# Altium PCB TK510_Signalbakplan.PcbDoc
Units mm, origin at the board's own origin, x right, y up, seen from the top; angles counter-clockwise.
Board outline 300 x 100 mm, 4 copper layers (Component Side, Ground Plane, Power Plane, Solder Side), stack 0.844 mm thick; 144 components, 132 nets, 717 pads, 0 vias.
Unrouted connection lines stored in the file: 233.
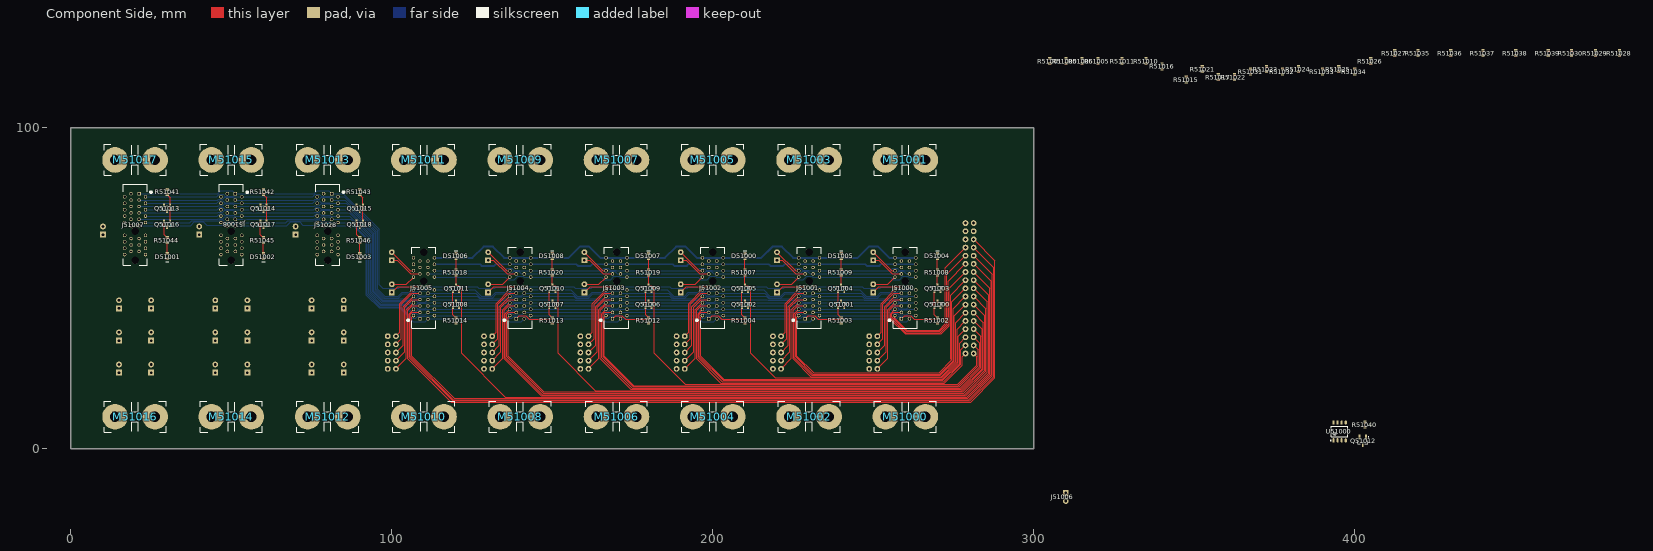
[diagram p0: Component Side view]
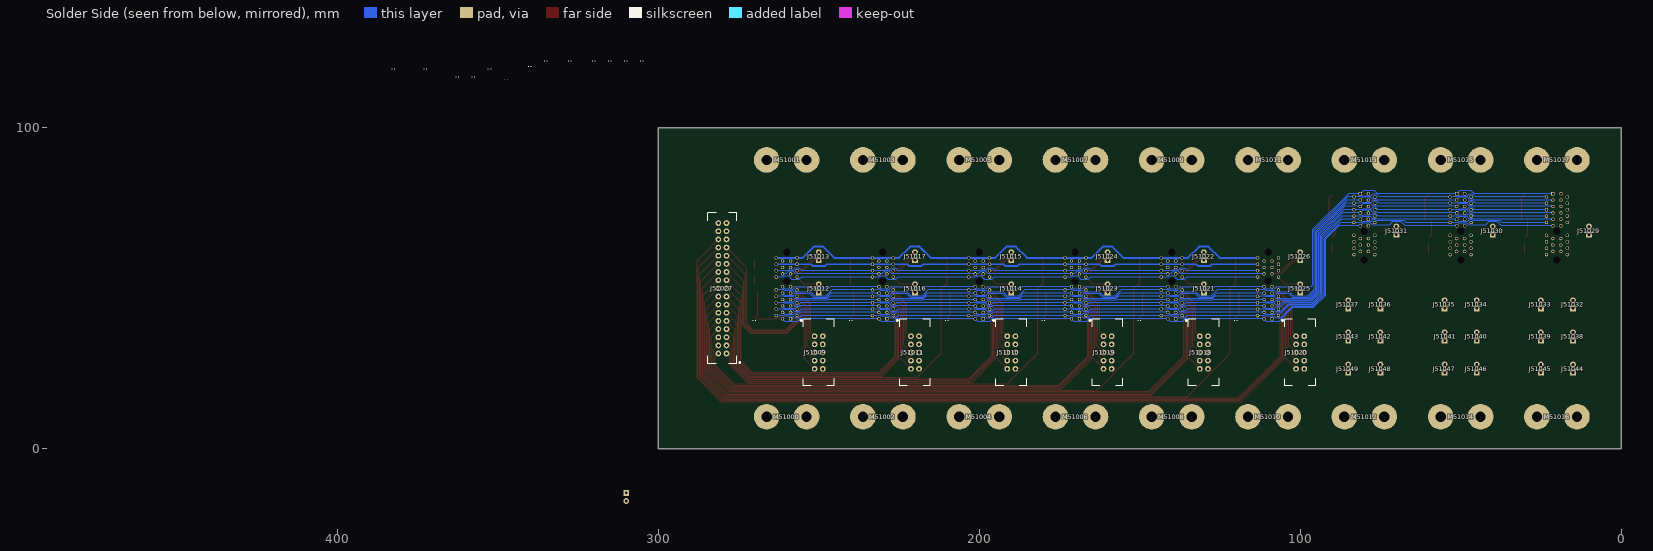
[diagram p1: Solder Side view, seen from below]
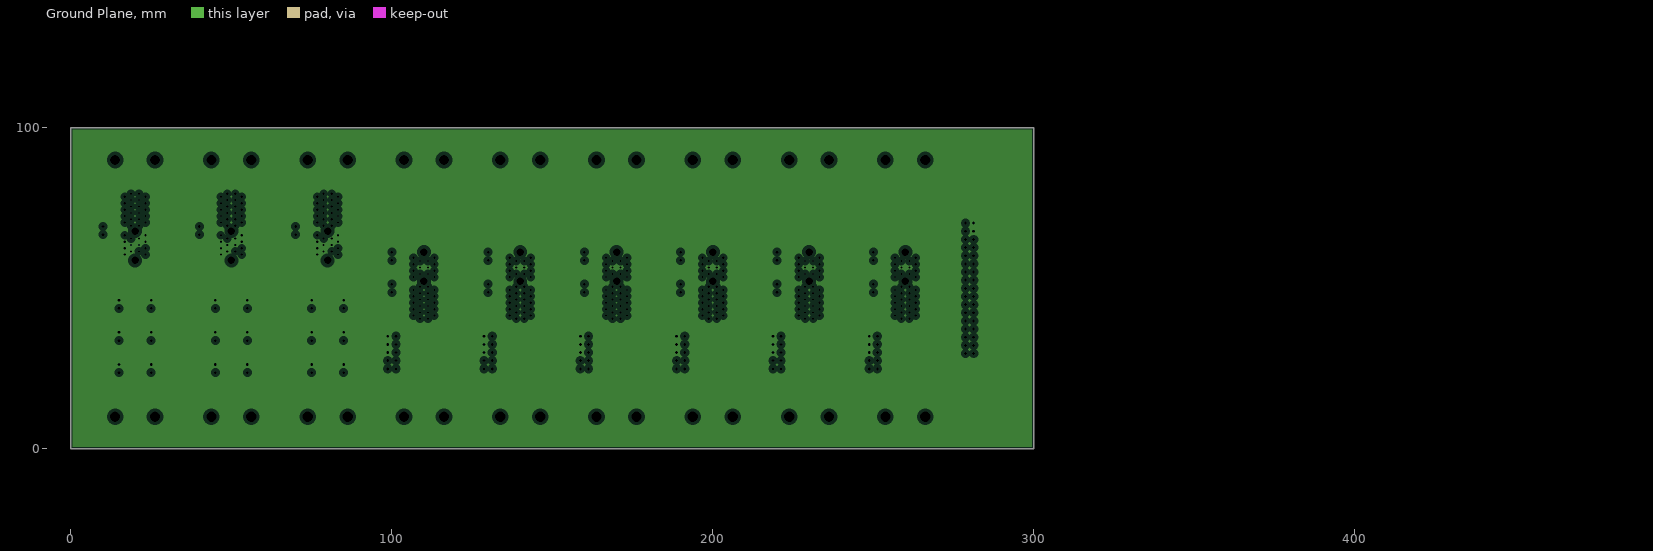
[diagram p2: Ground Plane, clearances drawn from the general rule]
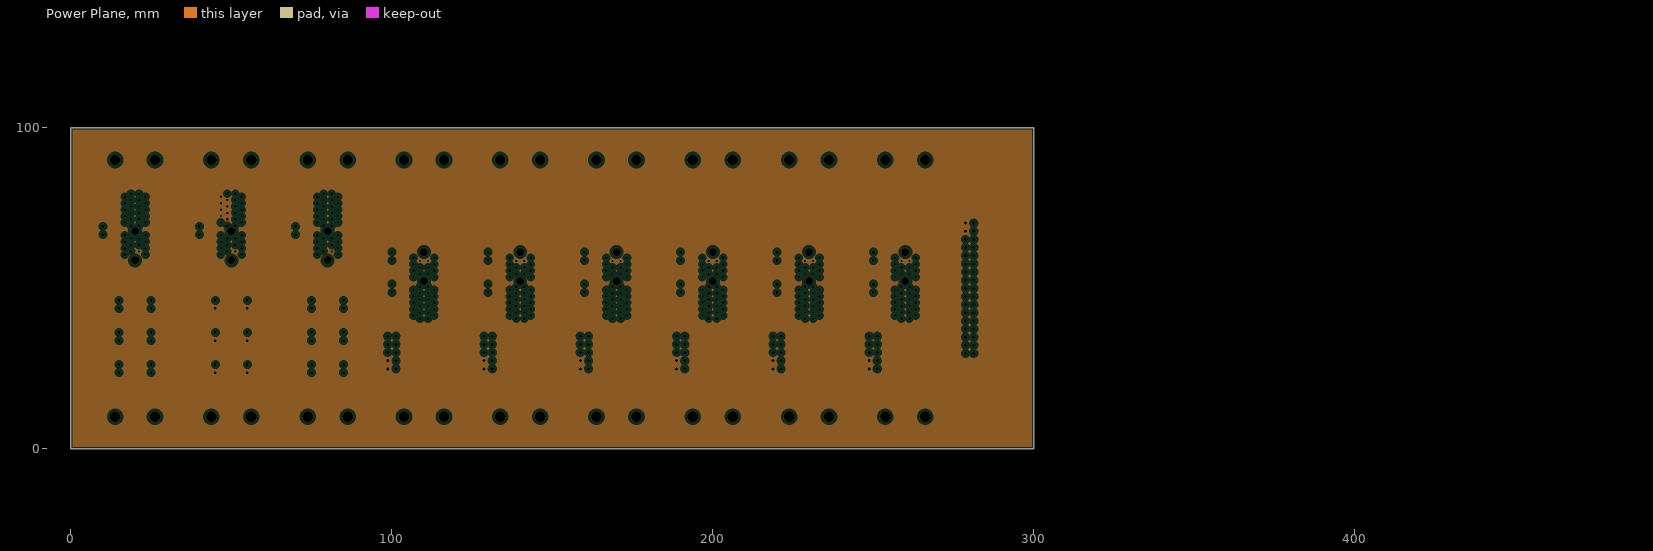
[diagram p3: Power Plane, clearances drawn from the general rule]

## Layer stack, top to bottom
Top Solder: solder mask 0.0102, Solder Resist, Dk 3.5
Component Side: signal copper 0.0356
Dielectric 1: core 0.32, FR-4, Dk 4.8
Ground Plane: plane copper 0.036, net GND
Dielectric 3: prepreg 0.127, Dk 4.2
Power Plane: plane copper 0.036, net VCC_P5V0
Dielectric 4: core 0.254, Dk 4.2
Solder Side: signal copper 0.0356
Bottom Solder: solder mask 0.0102, Solder Resist, Dk 3.5

## Board outline
0,0 0,100 300,100 300,0 0,0

## Design rules (kind name [scope] priority, off if disabled: settings)
Clearance [All] p1: gap=0.16 except(0: Arc-Text Track-Text SMDPad-Text THPad-Text Via-Text Fill-Text Poly-Text Region-Text Text-Text)
Height [All] p1: minheight=0 maxheight=200 prefheight=12.7
HoleSize [All] p1: absolutevalues=TRUE maxlimit=6.35 minlimit=0.3 maxpercent=80.000 minpercent=20.000
MinimumSolderMaskSliver [All] p1: minsoldermaskwidth=0.1
PlaneClearance [All] p1: clearance=1
PlaneConnect [All] p1: planeconnectstyle=Relief reliefexpansion=0.508 reliefentries=4 reliefconductorwidth=1 reliefairgap=0.254
PolygonConnect PolygonConnect_1 [IsVia] p1: connectstyle=Direct reliefconductorwidth=0.254 reliefentries=4 polygonreliefangle="90 Angle" airgapwidth=0.254
PolygonConnect [All] p2: connectstyle=Relief reliefconductorwidth=0.2 reliefentries=4 polygonreliefangle="90 Angle" airgapwidth=0.2
RoutingVias [All] p1: holewidth=0.3 width=0.6 viastyle="Through Hole" minholewidth=0.3 minwidth=0.6 maxholewidth=6.35 maxwidth=10
SilkToSolderMaskClearance [IsPad] p1: minsilkscreentomaskgap=0.178 clearancetoexposedcopper=TRUE
SolderMaskExpansion [All] p1: expansion=0.102
Width [All] p1: maxlimit=10 minlimit=0.16 preferedwidth=0.4
24 further rules are at their usual default settings.

## Classes and differential pairs
component class TK510: M51000 M51001 M51002 M51003 M51004 M51005 M51006 M51007 M51008 M51009 M51010 M51011 M51012 M51013 M51014 M51015 M51016 M51017

## Components (designator, comment, footprint, x,y, rotation, side; value= is the part's Value field where it differs from the comment)
D51000 "SMD LED Red" I_LEDC0603(1608)_N 210,60 r90 top locked
D51001 "SMD LED Red" I_LEDC0603(1608)_N 30,60 r270 top locked
D51002 "SMD LED Red" I_LEDC0603(1608)_N 60,60 r270 top locked
D51003 "SMD LED Red" I_LEDC0603(1608)_N 90,60 r270 top locked
D51004 "SMD LED Red" I_LEDC0603(1608)_N 270,60 r90 top locked
D51005 "SMD LED Red" I_LEDC0603(1608)_N 240,60 r90 top locked
D51006 "SMD LED Red" I_LEDC0603(1608)_N 120,60 r90 top locked
D51007 "SMD LED Red" I_LEDC0603(1608)_N 180,60 r90 top locked
D51008 "SMD LED Red" I_LEDC0603(1608)_N 150,60 r90 top locked
J51000 "PCI_Express-36P" PCI_Express-36P 260,50 r90 top locked
J51001 "PCI_Express-36P" PCI_Express-36P 230,50 r90 top locked
J51002 "PCI_Express-36P" PCI_Express-36P 200,50 r90 top locked
J51003 "PCI_Express-36P" PCI_Express-36P 170,50 r90 top locked
J51004 "PCI_Express-36P" PCI_Express-36P 140,50 r90 top locked
J51005 "PCI_Express-36P" PCI_Express-36P 110,50 r90 top locked
J51006 "JST 2pin" JST_2P 310,-15 r180 top locked
J51007 "PCI_Express-36P" PCI_Express-36P 20,70 r270 top locked
J51008 "PCI_Express-36P" PCI_Express-36P 50,70 r270 top locked
J51009 "2X5PConnector" HDRV10W64P254_2X5_2030X900X900B 250,30 r180 bottom locked
J51010 "2X5PConnector" HDRV10W64P254_2X5_2030X900X900B 190,30 r180 bottom locked
J51011 "2X5PConnector" HDRV10W64P254_2X5_2030X900X900B 220,30 r180 bottom locked
J51012 "JST 2pin" JST_2P 250,50 r180 bottom locked
J51013 "JST 2pin" JST_2P 250,60 r180 bottom locked
J51014 "JST 2pin" JST_2P 190,50 r180 bottom locked
J51015 "JST 2pin" JST_2P 190,60 r180 bottom locked
J51016 "JST 2pin" JST_2P 220,50 r180 bottom locked
J51017 "JST 2pin" JST_2P 220,60 r180 bottom locked
J51018 "2X5PConnector" HDRV10W64P254_2X5_2030X900X900B 130,30 r180 bottom locked
J51019 "2X5PConnector" HDRV10W64P254_2X5_2030X900X900B 160,30 r180 bottom locked
J51020 "2X5PConnector" HDRV10W64P254_2X5_2030X900X900B 100,30 r180 bottom locked
J51021 "JST 2pin" JST_2P 130,50 r180 bottom locked
J51022 "JST 2pin" JST_2P 130,60 r180 bottom locked
J51023 "JST 2pin" JST_2P 160,50 r180 bottom locked
J51024 "JST 2pin" JST_2P 160,60 r180 bottom locked
J51025 "JST 2pin" JST_2P 100,50 r180 bottom locked
J51026 "JST 2pin" JST_2P 100,60 r180 bottom locked
J51027 "2X17PConnector" HDRV34W64P254_2X17_5070X900X900B 280,50 r0 bottom locked
J51028 "PCI_Express-36P" PCI_Express-36P 80,70 r270 top locked
J51029 "JST 2pin" JST_2P 10,68 r180 bottom locked
J51030 "JST 2pin" JST_2P 40,68 r180 bottom locked
J51031 "JST 2pin" JST_2P 70,68 r180 bottom locked
J51032 "JST 2pin" JST_2P 15,45 r180 bottom locked
J51033 "JST 2pin" JST_2P 25,45 r180 bottom locked
J51034 "JST 2pin" JST_2P 45,45 r180 bottom locked
J51035 "JST 2pin" JST_2P 55,45 r180 bottom locked
J51036 "JST 2pin" JST_2P 75,45 r180 bottom locked
J51037 "JST 2pin" JST_2P 85,45 r180 bottom locked
J51038 "JST 2pin" JST_2P 15,35 r180 bottom locked
J51039 "JST 2pin" JST_2P 25,35 r180 bottom locked
J51040 "JST 2pin" JST_2P 45,35 r180 bottom locked
J51041 "JST 2pin" JST_2P 55,35 r180 bottom locked
J51042 "JST 2pin" JST_2P 75,35 r180 bottom locked
J51043 "JST 2pin" JST_2P 85,35 r180 bottom locked
J51044 "JST 2pin" JST_2P 15,25 r180 bottom locked
J51045 "JST 2pin" JST_2P 25,25 r180 bottom locked
J51046 "JST 2pin" JST_2P 45,25 r180 bottom locked
J51047 "JST 2pin" JST_2P 55,25 r180 bottom locked
J51048 "JST 2pin" JST_2P 75,25 r180 bottom locked
J51049 "JST 2pin" JST_2P 85,25 r180 bottom locked
M51000 "CardHolder" CardHolder900X1900X84000 260,10 r270 top locked
M51001 "CardHolder" CardHolder900X1900X84000 260,90 r270 top locked
M51002 "CardHolder" CardHolder900X1900X84000 230,10 r270 top locked
M51003 "CardHolder" CardHolder900X1900X84000 230,90 r270 top locked
M51004 "CardHolder" CardHolder900X1900X84000 200,10 r270 top locked
M51005 "CardHolder" CardHolder900X1900X84000 200,90 r270 top locked
M51006 "CardHolder" CardHolder900X1900X84000 170,10 r270 top locked
M51007 "CardHolder" CardHolder900X1900X84000 170,90 r270 top locked
M51008 "CardHolder" CardHolder900X1900X84000 140,10 r270 top locked
M51009 "CardHolder" CardHolder900X1900X84000 140,90 r270 top locked
M51010 "CardHolder" CardHolder900X1900X84000 110,10 r270 top locked
M51011 "CardHolder" CardHolder900X1900X84000 110,90 r270 top locked
M51012 "CardHolder" CardHolder900X1900X84000 80,10 r270 top locked
M51013 "CardHolder" CardHolder900X1900X84000 80,90 r270 top locked
M51014 "CardHolder" CardHolder900X1900X84000 50,10 r270 top locked
M51015 "CardHolder" CardHolder900X1900X84000 50,90 r270 top locked
M51016 "CardHolder" CardHolder900X1900X84000 20,10 r270 top locked
M51017 "CardHolder" CardHolder900X1900X84000 20,90 r270 top locked
Q51000 "2N7002" SOT23-3_N 270,45 r180 top locked
Q51001 "2N7002" SOT23-3_N 240,45 r180 top locked
Q51002 "2N7002" SOT23-3_N 210,45 r180 top locked
Q51003 "BSH201" SOT23-3_N 270,50 r180 top locked
Q51004 "BSH201" SOT23-3_N 240,50 r180 top locked
Q51005 "BSH201" SOT23-3_N 210,50 r180 top locked
Q51006 "2N7002" SOT23-3_N 180,45 r180 top locked
Q51007 "2N7002" SOT23-3_N 150,45 r180 top locked
Q51008 "2N7002" SOT23-3_N 120,45 r180 top locked
Q51009 "BSH201" SOT23-3_N 180,50 r180 top locked
Q51010 "BSH201" SOT23-3_N 150,50 r180 top locked
Q51011 "BSH201" SOT23-3_N 120,50 r180 top locked
Q51012 "TSM2314" SOT95P280X130-3N 402.5,2.5 r270 top
Q51013 "2N7002" SOT23-3_N 30,75 r0 top locked
Q51014 "2N7002" SOT23-3_N 60,75 r0 top locked
Q51015 "2N7002" SOT23-3_N 90,75 r0 top locked
Q51016 "BSH201" SOT23-3_N 30,70 r0 top locked
Q51017 "BSH201" SOT23-3_N 60,70 r0 top locked
Q51018 "BSH201" SOT23-3_N 90,70 r0 top locked
R51000 "100k" RESC0603(1608)_N#1 310,120.8 r270 top
R51001 "100k" RESC0603(1608)_N#1 305,120.8 r270 top
R51002 "100k" RESC0603(1608)_N#1 270,40 r270 top locked
R51003 "100k" RESC0603(1608)_N#1 240,40 r270 top locked
R51004 "100k" RESC0603(1608)_N#1 210,40 r270 top locked
R51005 "100k" RESC0603(1608)_N#1 320,120.8 r270 top
R51006 "100k" RESC0603(1608)_N#1 315,120.8 r270 top
R51007 "47R" RESC0603(1608)_N#1 210,55 r270 top locked
R51008 "47R" RESC0603(1608)_N#1 270,55 r270 top locked
R51009 "47R" RESC0603(1608)_N#1 240,55 r270 top locked
R51010 "100k" RESC0603(1608)_N#1 335,120.8 r270 top
R51011 "100k" RESC0603(1608)_N#1 327.5,120.8 r270 top
R51012 "100k" RESC0603(1608)_N#1 180,40 r270 top locked
R51013 "100k" RESC0603(1608)_N#1 150,40 r270 top locked
R51014 "100k" RESC0603(1608)_N#1 120,40 r270 top locked
R51015 "100k" RESC0603(1608)_N#1 347.5,115 r270 top
R51016 "100k" RESC0603(1608)_N#1 340,119.1 r270 top
R51017 "100k" RESC0603(1608)_N#1 357.5,115.8 r270 top
R51018 "47R" RESC0603(1608)_N#1 120,55 r270 top locked
R51019 "47R" RESC0603(1608)_N#1 180,55 r270 top locked
R51020 "47R" RESC0603(1608)_N#2 150,55 r90 top locked
R51021 "100k" RESC0603(1608)_N#1 352.5,118.3 r270 top
R51022 "100k" RESC0603(1608)_N#1 362.5,115.8 r270 top
R51023 "100k" RESC0603(1608)_N#1 372.5,118.3 r270 top
R51024 "100k" RESC0603(1608)_N#1 382.5,118.3 r270 top
R51025 "100k" RESC0603(1608)_N#1 395,118.3 r270 top
R51026 "100k" RESC0603(1608)_N#1 405,120.8 r270 top
R51027 "100k" RESC0603(1608)_N#1 412.5,123.3 r270 top
R51028 "100k" RESC0603(1608)_N#1 482.5,123.3 r270 top
R51029 "100k" RESC0603(1608)_N#2 475,123.3 r270 top
R51030 "100k" RESC0603(1608)_N#2 467.5,123.3 r270 top
R51031 "100k" RESC0603(1608)_N#1 367.5,117.5 r90 top
R51032 "100k" RESC0603(1608)_N#1 377.5,117.5 r90 top
R51033 "100k" RESC0603(1608)_N#1 390,117.5 r90 top
R51034 "100k" RESC0603(1608)_N#1 400,117.5 r90 top
R51035 "100k" RESC0603(1608)_N#1 419.699,123.299 r90 top
R51036 "100k" RESC0603(1608)_N#1 429.899,123.299 r90 top
R51037 "100k" RESC0603(1608)_N#1 439.999,123.299 r90 top
R51038 "100k" RESC0603(1608)_N#1 450.198,123.299 r90 top
R51039 "100k" RESC0603(1608)_N#1 460.298,123.299 r90 top
R51040 "100k" RESC0603(1608)_N#1 403.198,7.499 r90 top
R51041 "100k" RESC0603(1608)_N#1 30,80 r90 top locked
R51042 "100k" RESC0603(1608)_N#1 60,80 r90 top locked
R51043 "100k" RESC0603(1608)_N#1 90,80 r90 top locked
R51044 "47R" RESC0603(1608)_N#1 30,65 r90 top locked
R51045 "47R" RESC0603(1608)_N#1 60,65 r90 top locked
R51046 "47R" RESC0603(1608)_N#1 90,65 r90 top locked
U51000 "Dual_Optocoupler" SOIC127P590X363-8N 395.298,5.399 r90 top

## Footprints (in the part's own frame and the unit in brackets; to place one, negate y for a bottom-side part, rotate by r counter-clockwise, add the part's x,y. Pads: shape width x height; smd on the part's side, far side on the other; paste and mask are expansions set on the pad)
CardHolder900X1900X84000 [mm]
  round 8 hole 3.2: 0(0,6.223) 0(0,-6.223)
  silkscreen extent -4.83,-9.65 4.83,9.65, body extent -4.57,-9.4 4.57,9.4, height 83.82
HDRV10W64P254_2X5_2030X900X900B [mm]
  round 1.8 hole 0.9: 1(-1.27,5.08) 2(1.27,5.08) 3(-1.27,2.54) 4(1.27,2.54) 5(-1.27,0) 6(1.27,0) 7(-1.27,-2.54) 8(1.27,-2.54) 9(-1.27,-5.08) 10(1.27,-5.08)
  silkscreen extent -5.7,-10.4 4.8,10.4, body extent -4.57,-10.16 4.57,10.16, height 9.86
HDRV34W64P254_2X17_5070X900X900B [mm]
  round 1.8 hole 0.9: 1(-1.27,20.32) 2(1.27,20.32) 3(-1.27,17.78) 4(1.27,17.78) 5(-1.27,15.24) 6(1.27,15.24) 7(-1.27,12.7) 8(1.27,12.7) 9(-1.27,10.16) 10(1.27,10.16) 11(-1.27,7.62) 12(1.27,7.62) 13(-1.27,5.08) 14(1.27,5.08) 15(-1.27,2.54) 16(1.27,2.54) 17(-1.27,0) 18(1.27,0) 19(-1.27,-2.54) 20(1.27,-2.54) 21(-1.27,-5.08) 22(1.27,-5.08) 23(-1.27,-7.62) 24(1.27,-7.62) 25(-1.27,-10.16) 26(1.27,-10.16) 27(-1.27,-12.7) 28(1.27,-12.7) 29(-1.27,-15.24) 30(1.27,-15.24) 31(-1.27,-17.78) 32(1.27,-17.78) 33(-1.27,-20.32) 34(1.27,-20.32)
  silkscreen extent -5.6,-23.5 4.5,23.5, body extent -4.87,-22.95 4.88,22.95, height 10.45
I_LEDC0603(1608)_N [mm] "Chip Resistor, Body 1.6x0.8mm, IPC Medium Density"
  rect 0.9x1 smd: 1(-0.8,0) 2(0.8,0)
  silkscreen extent -0.05,-0.51 1.65,0.51, body extent -0.85,-0.45 0.85,0.45, height 0.9
JST_2P [mm]
  rect 1.8x1.8 hole 0.8: 1(0,-1.27)
  round 1.8 hole 0.8: 2(0,1.27)
  body extent -2.4,-3.7 3.35,3.7, height 7
PCI_Express-36P [mm] "Board-to-Board Connector, PTH, Vertical, Pitch 1.00mm, 36-Position"
  rect 1.05x1.05 hole 0.7: A1(-9.5,1.245)
  round 1.05 hole 0.7: A2(-8.5,3.245) A3(-7.5,1.245) A4(-6.5,3.245) A5(-5.5,1.245) A6(-4.5,3.245) A7(-3.5,1.245) A8(-2.5,3.245) A9(-1.5,1.245) A10(-0.5,3.245) A11(0.5,1.245) A12(3.5,3.245) A13(4.5,1.245) A14(5.5,3.245) A15(6.5,1.245) A16(7.5,3.245) A17(8.5,1.245) A18(9.5,3.245) B1(-9.5,-1.255) B2(-8.5,-3.255) B3(-7.5,-1.255) B4(-6.5,-3.255) B5(-5.5,-1.255) B6(-4.5,-3.255) B7(-3.5,-1.255) B8(-2.5,-3.255) B9(-1.5,-1.255) B10(-0.5,-3.255) B11(0.5,-1.255) B12(3.5,-3.255) B13(4.5,-1.255) B14(5.5,-3.255) B15(6.5,-1.255) B16(7.5,-3.255) B17(8.5,-1.255) B18(9.5,-3.255)
  round 2.05 hole 2.35 unplated: MH1(2.15,-0.005) MH2(11.3,-0.005)
  silkscreen extent -12.47,-3.76 12.78,5.25, body extent -12.5,-4.86 12.5,3.75, height 11.01
RESC0603(1608)_N#1 [mm] "Chip Resistor, Body 1.6x0.8mm, IPC Medium Density"
  rect 0.9x1 smd: 1(-0.8,0) 2(0.8,0)
  body extent -0.85,-0.47 0.85,0.47, height 0.6
RESC0603(1608)_N#2 [mm] "Chip Resistor, Body 1.6x0.8mm, IPC Medium Density"
  rect 0.9x1 smd: 1(0.8,0) 2(-0.8,0)
  silkscreen extent -0.05,-0.4 0.05,0.4, body extent -0.85,-0.47 0.85,0.47, height 0.6
SOIC127P590X363-8N [mm] "SOIC, 8-Leads, Body 4,88x3,91mm, Pitch 1,27mm, IPC Medium Density"
  oval 1.35x0.65 smd: 1(-2.775,1.905) 2(-2.775,0.635) 3(-2.775,-0.635) 4(-2.775,-1.905) 5(2.775,-1.905) 6(2.775,-0.635) 7(2.775,0.635) 8(2.775,1.905)
  silkscreen extent -2.9,-2.55 1.7,2.9, body extent -3.1,-2.5 3.1,2.5, height 1.75
SOT23-3_N [mm] "SOT23, 3-Leads, Body 1.3x2.9mm, Pitch 0.95mm"
  rect 0.6x1 smd paste-0.05: 1(0.95,1) 2(-0.95,1) 3(0,-1)
  silkscreen extent -1.45,-0.65 1.45,0.65, body extent -1.45,-1.4 1.45,1.4, height 1.3
SOT95P280X130-3N [mm] "SOT23, 3-Leads, Body 2,90x2,80mm, Pitch 0,95mm, IPC Medium Density"
  rect 1.55x0.6 smd: 1(-1.125,0.95) 2(-1.125,-0.95) 3(1.125,0)
  silkscreen extent -1.25,-1.5 0.85,1.93, body extent -1.32,-1.5 1.32,1.5, height 1.08

## Part data
D51000 D51001 D51002 D51003 D51004 D51005 D51006 D51007 D51008: library part 2209
J51000 J51001 J51002 J51003 J51004 J51005 J51007 J51008 J51028: library part 2382
J51006 J51012 J51013 J51014 J51015 J51016 J51017 J51021 J51022 J51023 J51024 J51025 J51026 J51029 J51030 J51031 J51032 J51033 J51034 J51035 J51036 J51037 J51038 J51039 J51040 J51041 J51042 J51043 J51044 J51045 J51046 J51047 J51048 J51049: library part 2227, "pris pr. stk."
J51009 J51010 J51011 J51018 J51019 J51020: library part 2391, "Header"
J51027: library part 2390, "Header"
M51000 M51001 M51002 M51003 M51004 M51005 M51006 M51007 M51008 M51009 M51010 M51011 M51012 M51013 M51014 M51015 M51016 M51017: library part 2392, "Støtter kort i bakplan"
Q51000 Q51001 Q51002 Q51006 Q51007 Q51008 Q51013 Q51014 Q51015: library part 2213, "N-Channel MOSFET 300mA"
Q51003 Q51004 Q51005 Q51009 Q51010 Q51011 Q51016 Q51017 Q51018: library part 2212, "P-Channel MOSFET 300mA"
Q51012: library part 2389, "N-Channel MOSFET"
R51000 R51001 R51002 R51003 R51004 R51005 R51006 R51010 R51011 R51012 R51013 R51014 R51015 R51016 R51017 R51021 R51022 R51023 R51024 R51025 R51026 R51027 R51028 R51029 R51030 R51031 R51032 R51033 R51034 R51035 R51036 R51037 R51038 R51039 R51040 R51041 R51042 R51043: library part 2384, "0.1W 1% Thick film resistor"
R51007 R51008 R51009 R51018 R51019 R51020 R51044 R51045 R51046: library part 2388, "0.1W 1% Thick film resistor"
U51000: library part 2379, "Dual Optocoupler"

## Nets (pads, with @x,y where several pads share a name; then routed paths per layer and width w, separated by ;. In a path a pad name is that pad's centre, name@x,y a point inside that pad or via, vN(x,y) a via of type N, cw(c..) or ccw(c..) an arc to the next point about the centre after c; other vN are vias at no path point)
0_FE: J51000.A2 J51027.27 | length 45.2
  Component Side w0.2: J51000.A2 256.755,40.745 260.5,37 270.5,37 272.5,39 272.5,56.47 J51027.27
0_INT: J51000.A4 J51027.23 | length 45.3
  Component Side w0.2: J51000.A4 255.4,42.145 255.4,40.9 260.1,36.2 270.9,36.2 273.3,38.6 273.3,52.19 J51027.23
0_KI: J51027.29 Q51003.3 R51008.2 | length 3.2
  Component Side w0.2: Q51003.3 R51008.2
0_KNP: J51000.A5 J51027.21 | length 47.4
  Component Side w0.2: J51000.A5 256.4,44.5 255,43.1 255,40.7 259.9,35.8 271.2,35.8 273.7,38.3 273.7,50.05 J51027.21
0_ST: J51000.A3 J51027.25 | length 47.7
  Component Side w0.2: J51000.A3 256.3,42.5 255.8,42 255.8,41.1 260.3,36.6 270.7,36.6 272.9,38.8 272.9,54.33 J51027.25
1_FE: J51001.A2 J51027.17 | length 89
  Component Side w0.2: J51001.A2 226.2,40.945 226.2,28.9 231.4,23.7 270.5,23.7 274.5,27.7 274.5,45.77 J51027.17
1_INT: J51001.A4 J51027.13 | length 88.7
  Component Side w0.2: J51001.A4 225.4,42.145 225.4,28.4 230.9,22.9 270.9,22.9 275.3,27.3 275.3,41.49 J51027.13
1_KI: J51027.19 Q51004.3 R51009.2 | length 29.8
  Component Side w0.2: Q51004.3 R51009.2 ; 274.1,27.9 274.1,47.91 J51027.19
1_KNP: J51001.A5 J51027.11 | length 90.9
  Component Side w0.2: J51001.A5 226.4,44.5 225,43.1 225,28 230.5,22.5 271.1,22.5 275.7,27.1 275.7,39.35 J51027.11
1_ST: J51001.A3 J51027.15 | length 91
  Component Side w0.2: J51001.A3 226.4,42.5 225.8,41.9 225.8,28.7 231.2,23.3 270.7,23.3 274.9,27.5 274.9,43.63 J51027.15
2_FE: J51002.A2 J51027.7 | length 109.7
  Component Side w0.2: J51002.A2 196.2,40.945 196.2,28.9 203.4,21.7 271.5,21.7 276.5,26.7 276.5,35.07 J51027.7
2_INT: J51002.A4 J51027.3 | length 109.4
  Component Side w0.2: J51002.A4 195.4,42.145 195.4,28.4 202.9,20.9 271.9,20.9 277.3,26.3 277.3,30.79 J51027.3
2_KI: J51027.9 Q51005.3 R51007.2 | length 109.1
  Component Side w0.2: R51007.2 Q51005.3 210.7,51 211.8,49.9 211.8,29.7 219.4,22.1 271.3,22.1 276.1,26.9 276.1,37.21 J51027.9
2_KNP: J51002.A5 J51027.1 | length 111.6
  Component Side w0.2: J51002.A5 196.4,44.5 195,43.1 195,28 202.5,20.5 272.1,20.5 277.7,26.1 277.7,28.65 J51027.1
2_ST: J51002.A3 J51027.5 | length 111.7
  Component Side w0.2: J51002.A3 196.4,42.5 195.8,41.9 195.8,28.7 203.2,21.3 271.7,21.3 276.9,26.5 276.9,32.93 J51027.5
3_FE: J51003.A2 J51027.4 | length 142.6
  Component Side w0.2: J51003.A2 166.2,40.945 166.2,28.9 175.4,19.7 276.5,19.7 282.7,25.9 282.7,30.79 J51027.4
3_INT: J51003.A4 J51027.8 | length 153.3
  Component Side w0.2: J51003.A4 165.4,42.145 165.4,28.4 174.9,18.9 277.1,18.9 283.5,25.3 283.5,35.07 J51027.8
3_KI: J51027.2 Q51009.3 R51019.2 | length 136.6
  Component Side w0.2: R51019.2 Q51009.3 180.7,51 181.8,49.9 181.8,29.7 191.4,20.1 276.3,20.1 282.3,26.1 282.3,28.65 J51027.2
3_KNP: J51003.A5 J51027.10 | length 160.9
  Component Side w0.2: J51003.A5 166.4,44.5 165,43.1 165,28 174.5,18.5 277.4,18.5 283.9,25 283.9,37.21 J51027.10
3_ST: J51003.A3 J51027.6 | length 150.1
  Component Side w0.2: J51003.A3 166.4,42.5 165.8,41.9 165.8,28.7 175.2,19.3 276.8,19.3 283.1,25.6 283.1,32.93 J51027.6
4_FE: J51004.A2 J51027.14 | length 190.6
  Component Side w0.2: J51004.A2 136.2,40.945 136.2,28.9 147.4,17.7 277.9,17.7 284.7,24.5 284.7,41.49 J51027.14
4_INT: J51004.A4 J51027.18 | length 201.3
  Component Side w0.2: J51004.A4 135.4,42.145 135.4,28.4 146.9,16.9 278.5,16.9 285.5,23.9 285.5,45.77 J51027.18
4_KI: J51027.12 Q51010.3 R51020.2 | length 184.6
  Component Side w0.2: R51020.2 Q51010.3 150.7,51 151.8,49.9 151.8,29.7 163.4,18.1 277.6,18.1 284.3,24.8 284.3,39.35 J51027.12
4_KNP: J51004.A5 J51027.20 | length 208.9
  Component Side w0.2: J51004.A5 136.4,44.5 135,43.1 135,28 146.5,16.5 278.8,16.5 285.9,23.6 285.9,47.91 J51027.20
4_ST: J51004.A3 J51027.16 | length 198.1
  Component Side w0.2: J51004.A3 136.4,42.5 135.8,41.9 135.8,28.7 147.2,17.3 278.2,17.3 285.1,24.2 285.1,43.63 J51027.16
5_FE: J51005.A2 J51027.24 | length 238.7
  Component Side w0.2: J51005.A2 106.2,40.945 106.2,28.9 119.4,15.7 279.4,15.7 286.7,23 286.7,52.19 J51027.24
5_INT: J51005.A4 J51027.28 | length 249.3
  Component Side w0.2: J51005.A4 105.4,42.145 105.4,28.4 118.9,14.9 280,14.9 287.5,22.4 287.5,56.47 J51027.28
5_KI: J51027.22 Q51011.3 R51018.2 | length 232.6
  Component Side w0.2: R51018.2 Q51011.3 120.7,51 121.8,49.9 121.8,29.7 135.4,16.1 279.1,16.1 286.3,23.3 286.3,50.05 J51027.22
5_KNP: J51005.A5 J51027.30 | length 257
  Component Side w0.2: J51005.A5 106.4,44.5 105,43.1 105,28 118.5,14.5 280.3,14.5 287.9,22.1 287.9,58.61 J51027.30
5_ST: J51005.A3 J51027.26 | length 246.2
  Component Side w0.2: J51005.A3 106.4,42.5 105.8,41.9 105.8,28.7 119.2,15.3 279.7,15.3 287.1,22.7 287.1,54.33 J51027.26
AC_S6_L1: J51007.B11 J51029.2
AC_S6_L2: J51007.B12 J51029.1
AC_S7_L1: J51008.B11 J51030.2
AC_S7_L2: J51008.B12 J51030.1
AC_S8_L1: J51028.B11 J51031.2
AC_S8_L2: J51028.B12 J51031.1
B5: J51000.B5 J51001.B5 J51002.B5 J51003.B5 J51004.B5 J51005.B5 J51007.A7 J51008.A7 J51028.A7 R51017.1 R51021.2 | length 267.8
  Solder Side w0.2: J51007.A7 45.789,73.5 45.989,73.7 47.389,73.7 47.989,74.3 50.444,74.3 J51008.A7 75.789,73.5 75.989,73.7 77.389,73.7 77.989,74.3 80.444,74.3 J51028.A7 86.7,73.5 93.6,66.6 93.6,48.7 96.8,45.5 104.8,45.5 106,44.3 107.4,44.3 108,43.7 110.455,43.7 J51005.B5 135.8,44.5 136,44.3 137.4,44.3 138,43.7 140.455,43.7 J51004.B5 165.8,44.5 166,44.3 167.4,44.3 168,43.7 170.455,43.7 J51003.B5 195.8,44.5 196,44.3 197.4,44.3 198,43.7 200.455,43.7 J51002.B5 225.8,44.5 226,44.3 227.4,44.3 228,43.7 230.455,43.7 J51001.B5 255.8,44.5 256,44.3 257.4,44.3 258,43.7 260.455,43.7 J51000.B5
B6: J51000.B6 J51001.B6 J51002.B6 J51003.B6 J51004.B6 J51005.B6 J51007.A6 J51008.A6 J51028.A6 R51022.1 R51031.2 | length 267.9
  Solder Side w0.2: J51007.A6 45.634,74.5 46.435,75.3 47.389,75.3 47.989,74.7 50.689,74.7 50.89,74.5 J51008.A6 75.634,74.5 76.435,75.3 77.389,75.3 77.989,74.7 80.689,74.7 80.89,74.5 J51028.A6 86.4,74.5 94,66.9 94,48.9 97,45.9 105.246,45.9 106.446,44.7 107.4,44.7 108,45.3 110.7,45.3 110.9,45.5 J51005.B6 135.645,45.5 136.446,44.7 137.4,44.7 138,45.3 140.7,45.3 140.9,45.5 J51004.B6 165.645,45.5 166.446,44.7 167.4,44.7 168,45.3 170.7,45.3 170.9,45.5 J51003.B6 195.645,45.5 196.446,44.7 197.4,44.7 198,45.3 200.7,45.3 200.9,45.5 J51002.B6 225.645,45.5 226.446,44.7 227.4,44.7 228,45.3 230.7,45.3 230.9,45.5 J51001.B6 255.645,45.5 256.446,44.7 257.4,44.7 258,45.3 260.7,45.3 260.9,45.5 J51000.B6
B7: J51000.B7 J51001.B7 J51002.B7 J51003.B7 J51004.B7 J51005.B7 J51007.A5 J51008.A5 J51028.A5 R51023.1 R51032.2 | length 267.9
  Solder Side w0.2: J51007.A5 45.789,75.5 45.989,75.7 47.389,75.7 47.989,76.3 50.444,76.3 J51008.A5 75.789,75.5 75.989,75.7 77.389,75.7 77.989,76.3 80.444,76.3 J51028.A5 86.1,75.5 94.4,67.2 94.4,49.1 97.2,46.3 107.4,46.3 108,45.7 110.455,45.7 J51005.B7 127,46.5 127.2,46.3 137.4,46.3 138,45.7 140.455,45.7 J51004.B7 157,46.5 157.2,46.3 167.4,46.3 168,45.7 170.455,45.7 J51003.B7 187,46.5 187.2,46.3 197.4,46.3 198,45.7 200.455,45.7 J51002.B7 217,46.5 217.2,46.3 227.4,46.3 228,45.7 230.455,45.7 J51001.B7 247,46.5 247.2,46.3 257.4,46.3 258,45.7 260.455,45.7 J51000.B7
B8: J51000.B8 J51001.B8 J51002.B8 J51003.B8 J51004.B8 J51005.B8 J51007.A4 J51008.A4 J51028.A4 R51024.1 R51033.2 | length 268
  Solder Side w0.2: J51007.A4 45.389,76.5 46.189,77.3 47.389,77.3 47.989,76.7 50.689,76.7 50.889,76.5 J51008.A4 75.389,76.5 76.189,77.3 77.389,77.3 77.989,76.7 80.689,76.7 80.889,76.5 J51028.A4 85.8,76.5 94.8,67.5 94.8,49.3 97.4,46.7 107.4,46.7 108,47.3 110.7,47.3 110.9,47.5 J51005.B8 126.6,47.5 127.4,46.7 137.4,46.7 138,47.3 140.7,47.3 140.9,47.5 J51004.B8 156.6,47.5 157.4,46.7 167.4,46.7 168,47.3 170.7,47.3 170.9,47.5 J51003.B8 186.6,47.5 187.4,46.7 197.4,46.7 198,47.3 200.7,47.3 200.9,47.5 J51002.B8 216.6,47.5 217.4,46.7 227.4,46.7 228,47.3 230.7,47.3 230.9,47.5 J51001.B8 246.6,47.5 247.4,46.7 257.4,46.7 258,47.3 260.7,47.3 260.9,47.5 J51000.B8
B9: J51000.B9 J51001.B9 J51002.B9 J51003.B9 J51004.B9 J51005.B9 J51007.A3 J51008.A3 J51028.A3 R51025.1 R51034.2 | length 274
  Solder Side w0.2: J51007.A3 45.789,77.5 45.989,77.7 47.389,77.7 47.989,78.3 50.444,78.3 J51008.A3 75.789,77.5 75.989,77.7 77.389,77.7 77.989,78.3 80.444,78.3 J51028.A3 85.5,77.5 95.2,67.8 95.2,49.5 97.6,47.1 102.2,47.1 103.4,48.3 107.4,48.3 108,47.7 110.455,47.7 J51005.B9 126.2,48.5 127.6,47.1 131.4,47.1 132.6,48.3 137.4,48.3 138,47.7 140.455,47.7 J51004.B9 156.2,48.5 157.6,47.1 161.4,47.1 162.6,48.3 167.4,48.3 168,47.7 170.455,47.7 J51003.B9 186.2,48.5 187.6,47.1 191.4,47.1 192.6,48.3 197.4,48.3 198,47.7 200.455,47.7 J51002.B9 216.2,48.5 217.6,47.1 221.4,47.1 222.6,48.3 227.4,48.3 228,47.7 230.455,47.7 J51001.B9 246.2,48.5 247.6,47.1 251.4,47.1 252.6,48.3 257.4,48.3 258,47.7 260.455,47.7 J51000.B9
B10: J51000.B10 J51001.B10 J51002.B10 J51003.B10 J51004.B10 J51005.B10 J51007.A2 J51008.A2 J51028.A2 R51026.1 R51035.2 | length 274
  Solder Side w0.2: J51007.A2 45.389,78.5 46.174,79.285 47.405,79.285 47.989,78.7 50.689,78.7 50.889,78.5 J51008.A2 75.389,78.5 76.174,79.285 77.405,79.285 77.989,78.7 80.689,78.7 80.889,78.5 J51028.A2 85.2,78.5 95.6,68.1 95.6,49.7 97.8,47.5 102,47.5 103.2,48.7 107.4,48.7 108,49.3 110.7,49.3 110.9,49.5 J51005.B10 125.8,49.5 127.8,47.5 131.2,47.5 132.4,48.7 137.4,48.7 138,49.3 140.7,49.3 140.9,49.5 J51004.B10 155.8,49.5 157.8,47.5 161.2,47.5 162.4,48.7 167.4,48.7 168,49.3 170.7,49.3 170.9,49.5 J51003.B10 185.8,49.5 187.8,47.5 191.2,47.5 192.4,48.7 197.4,48.7 198,49.3 200.7,49.3 200.9,49.5 J51002.B10 215.8,49.5 217.8,47.5 221.2,47.5 222.4,48.7 227.4,48.7 228,49.3 230.7,49.3 230.9,49.5 J51001.B10 245.8,49.5 247.8,47.5 251.2,47.5 252.4,48.7 257.4,48.7 258,49.3 260.7,49.3 260.9,49.5 J51000.B10
B11: J51000.B11 J51001.B11 J51002.B11 J51003.B11 J51004.B11 J51005.B11 J51007.A1 J51008.A1 J51028.A1 R51027.1 R51036.2 | length 269.1
  Solder Side w0.2: J51007.A1 45.789,79.5 46.689,80.4 50.344,80.4 J51008.A1 75.789,79.5 76.689,80.4 80.344,80.4 J51028.A1 84.9,79.5 96,68.4 96,51.1 97.1,50 102.1,50 102.4,50.3 107.4,50.3 108,49.7 110.455,49.7 J51005.B11 126.6,50.5 127.1,50 132.1,50 132.4,50.3 137.4,50.3 138,49.7 140.455,49.7 J51004.B11 156.6,50.5 157.1,50 162.1,50 162.4,50.3 167.4,50.3 168,49.7 170.455,49.7 J51003.B11 186.6,50.5 187.1,50 192.1,50 192.4,50.3 197.4,50.3 198,49.7 200.455,49.7 J51002.B11 216.6,50.5 217.1,50 222.1,50 222.4,50.3 227.4,50.3 228,49.7 230.455,49.7 J51001.B11 246.6,50.5 247.1,50 252.1,50 252.4,50.3 257.4,50.3 258,49.7 260.455,49.7 J51000.B11
B12: J51000.B12 J51001.B12 J51002.B12 J51003.B12 J51004.B12 J51005.B12 R51028.1 R51037.2 | length 154.1
  Solder Side w0.2: J51005.B12 135.4,53.5 136.185,52.715 138.215,52.715 139.2,53.7 140.9,53.7 141.1,53.5 J51004.B12 165.4,53.5 166.185,52.715 168.215,52.715 169.2,53.7 170.9,53.7 171.1,53.5 J51003.B12 195.4,53.5 196.185,52.715 198.215,52.715 199.2,53.7 200.9,53.7 201.1,53.5 J51002.B12 225.4,53.5 226.185,52.715 228.215,52.715 229.2,53.7 230.9,53.7 231.1,53.5 J51001.B12 255.4,53.5 256.185,52.715 258.215,52.715 259.2,53.7 260.9,53.7 261.1,53.5 J51000.B12
B13: J51000.B13 J51001.B13 J51002.B13 J51003.B13 J51004.B13 J51005.B13 R51029.1 R51038.2 | length 153.3
  Solder Side w0.2: J51005.B13 137.2,54.5 138,55.3 139.5,55.3 140.3,54.5 J51004.B13 167.2,54.5 168,55.3 169.5,55.3 170.3,54.5 J51003.B13 197.2,54.5 198,55.3 199.5,55.3 200.3,54.5 J51002.B13 227.2,54.5 228,55.3 229.5,55.3 230.3,54.5 J51001.B13 257.2,54.5 258,55.3 259.5,55.3 260.3,54.5 J51000.B13
B14: J51000.B14 J51001.B14 J51002.B14 J51003.B14 J51004.B14 J51005.B14 R51030.1 R51039.2 | length 153.3
  Solder Side w0.2: J51005.B14 135.2,55.5 136,56.3 137.4,56.3 138,55.7 139.7,55.7 139.9,55.5 J51004.B14 165.2,55.5 166,56.3 167.4,56.3 168,55.7 169.7,55.7 169.9,55.5 J51003.B14 195.2,55.5 196,56.3 197.4,56.3 198,55.7 199.7,55.7 199.9,55.5 J51002.B14 225.2,55.5 226,56.3 227.4,56.3 228,55.7 229.7,55.7 229.9,55.5 J51001.B14 255.2,55.5 256,56.3 257.4,56.3 258,55.7 259.7,55.7 259.9,55.5 J51000.B14
FP_0_1: J51000.A6 J51009.9 | length 22.9
  Component Side w0.2: J51009.9 254.5,28.15 254.5,43.245 J51000.A6
FP_0_2: J51000.A7 J51009.7 | length 23.5
  Component Side w0.2: J51009.7 254,30.19 254,44.1 256.4,46.5 J51000.A7
FP_0_3: J51000.A8 J51009.5 | length 19.8
  Component Side w0.2: J51009.5 253.5,32.23 253.5,44.245 J51000.A8
FP_0_4: J51000.A9 J51009.3 | length 20.4
  Component Side w0.2: J51009.3 253,34.27 253,45.1 256.4,48.5 J51000.A9
FP_0_5: J51000.A10 J51009.1 | length 16.7
  Component Side w0.2: J51009.1 252.5,36.31 252.5,45.245 J51000.A10
FP_1_1: J51001.A6 J51011.9 | length 22.9
  Component Side w0.2: J51011.9 224.5,28.15 224.5,43.245 J51001.A6
FP_1_2: J51001.A7 J51011.7 | length 23.5
  Component Side w0.2: J51011.7 224,30.19 224,44.1 226.4,46.5 J51001.A7
FP_1_3: J51001.A8 J51011.5 | length 19.8
  Component Side w0.2: J51011.5 223.5,32.23 223.5,44.245 J51001.A8
FP_1_4: J51001.A9 J51011.3 | length 20.4
  Component Side w0.2: J51011.3 223,34.27 223,45.1 226.4,48.5 J51001.A9
FP_1_5: J51001.A10 J51011.1 | length 16.7
  Component Side w0.2: J51011.1 222.5,36.31 222.5,45.245 J51001.A10
FP_2_0: J51002.A6 J51010.9 | length 22.9
  Component Side w0.2: J51010.9 194.5,28.15 194.5,43.245 J51002.A6
FP_2_1: J51002.A7 J51010.7 | length 23.5
  Component Side w0.2: J51010.7 194,30.19 194,44.1 196.4,46.5 J51002.A7
FP_2_2: J51002.A8 J51010.5 | length 19.8
  Component Side w0.2: J51010.5 193.5,32.23 193.5,44.245 J51002.A8
FP_2_3: J51002.A9 J51010.3 | length 20.4
  Component Side w0.2: J51010.3 193,34.27 193,45.1 196.4,48.5 J51002.A9
FP_2_4: J51002.A10 J51010.1 | length 16.7
  Component Side w0.2: J51010.1 192.5,36.31 192.5,45.245 J51002.A10
FP_3_0: J51003.A6 J51019.9 | length 22.9
  Component Side w0.2: J51019.9 164.5,28.15 164.5,43.245 J51003.A6
FP_3_1: J51003.A7 J51019.7 | length 23.5
  Component Side w0.2: J51019.7 164,30.19 164,44.1 166.4,46.5 J51003.A7
FP_3_2: J51003.A8 J51019.5 | length 19.8
  Component Side w0.2: J51019.5 163.5,32.23 163.5,44.245 J51003.A8
FP_3_3: J51003.A9 J51019.3 | length 20.4
  Component Side w0.2: J51019.3 163,34.27 163,45.1 166.4,48.5 J51003.A9
FP_3_4: J51003.A10 J51019.1 | length 16.7
  Component Side w0.2: J51019.1 162.5,36.31 162.5,45.245 J51003.A10
FP_4_0: J51004.A6 J51018.9 | length 22.9
  Component Side w0.2: J51018.9 134.5,28.15 134.5,43.245 J51004.A6
FP_4_1: J51004.A7 J51018.7 | length 23.5
  Component Side w0.2: J51018.7 134,30.19 134,44.1 136.4,46.5 J51004.A7
FP_4_2: J51004.A8 J51018.5 | length 19.8
  Component Side w0.2: J51018.5 133.5,32.23 133.5,44.245 J51004.A8
FP_4_3: J51004.A9 J51018.3 | length 20.4
  Component Side w0.2: J51018.3 133,34.27 133,45.1 136.4,48.5 J51004.A9
FP_4_4: J51004.A10 J51018.1 | length 16.7
  Component Side w0.2: J51018.1 132.5,36.31 132.5,45.245 J51004.A10
FP_5_0: J51005.A6 J51020.9 | length 22.9
  Component Side w0.2: J51020.9 104.5,28.15 104.5,43.245 J51005.A6
FP_5_1: J51005.A7 J51020.7 | length 23.6
  Component Side w0.2: J51020.7 104,30.19 104,44.1 106.4,46.5 J51005.A7
  Solder Side w0.2: J51005.A7@108.755,46.39 J51005.A7
FP_5_2: J51005.A8 J51020.5 | length 19.8
  Component Side w0.2: J51020.5 103.5,32.23 103.5,44.245 J51005.A8
FP_5_3: J51005.A9 J51020.3 | length 20.4
  Component Side w0.2: J51020.3 103,34.27 103,45.1 106.4,48.5 J51005.A9
FP_5_4: J51005.A10 J51020.1 | length 16.7
  Component Side w0.2: J51020.1 102.5,36.31 102.5,45.245 J51005.A10
GND: D51000.2 D51001.2 D51002.2 D51003.2 D51004.2 D51005.2 D51006.2 D51007.2 D51008.2 J51000.A15 J51000.B15 J51001.A15 J51001.B15 J51002.A15 J51002.B15 J51003.A15 J51003.B15 J51004.A15 J51004.B15 J51005.A15 J51005.B15 J51007.A12 J51007.A13 J51007.A14 J51007.A15 J51007.B14 J51007.B15 J51007.B16 J51007.B17 J51007.B18 J51008.A12 J51008.A13 J51008.A14 J51008.A15 J51008.B14 J51008.B15 J51008.B16 J51008.B17 J51008.B18 J51009.2 J51009.4 J51009.6 J51010.2 J51010.4 J51010.6 J51011.2 J51011.4 J51011.6 J51018.2 J51018.4 J51018.6 J51019.2 J51019.4 J51019.6 J51020.2 J51020.4 J51020.6 J51027.32 J51027.34 J51028.A12 J51028.A13 J51028.A14 J51028.A15 J51028.B14 J51028.B15 J51028.B16 J51028.B17 J51028.B18 J51032.2 J51033.2 J51034.2 J51035.2 J51036.2 J51037.2 J51038.2 J51039.2 J51040.2 J51041.2 J51042.2 J51043.2 J51044.2 J51045.2 J51046.2 J51047.2 J51048.2 J51049.2 Q51000.2 Q51001.2 Q51002.2 Q51006.2 Q51007.2 Q51008.2 Q51012.2 Q51013.2 Q51014.2 Q51015.2 R51001.1 R51006.1 R51011.1 R51016.1 R51021.1 R51031.1 R51032.1 R51033.1 R51034.1 R51035.1 R51036.1 R51037.1 R51038.1 R51039.1 U51000.7
INTERRUPT: J51000.B4 J51001.B4 J51002.B4 J51003.B4 J51004.B4 J51005.B4 J51007.A8 J51008.A8 J51028.A8 R51015.1 R51016.2 | length 267.7
  Solder Side w0.2: J51007.A8 45.634,72.5 46.435,73.3 47.389,73.3 47.989,72.7 50.689,72.7 50.89,72.5 J51008.A8 75.634,72.5 76.435,73.3 77.389,73.3 77.989,72.7 80.689,72.7 80.89,72.5 J51028.A8 86.9,72.5 93.2,66.2 93.2,48.5 96.6,45.1 103.8,45.1 106.2,42.7 107.4,42.7 108,43.3 110.7,43.3 110.9,43.5 J51005.B4 135.4,43.5 136.2,42.7 137.4,42.7 138,43.3 140.7,43.3 140.9,43.5 J51004.B4 165.4,43.5 166.2,42.7 167.4,42.7 168,43.3 170.7,43.3 170.9,43.5 J51003.B4 195.4,43.5 196.2,42.7 197.4,42.7 198,43.3 200.7,43.3 200.9,43.5 J51002.B4 225.4,43.5 226.2,42.7 227.4,42.7 228,43.3 230.7,43.3 230.9,43.5 J51001.B4 255.4,43.5 256.2,42.7 257.4,42.7 258,43.3 260.7,43.3 260.9,43.5 J51000.B4
KORT_INNSATT: J51000.B1 J51001.B1 J51002.B1 J51003.B1 J51004.B1 J51005.B1 J51007.A11 J51008.A11 J51028.A11 Q51000.3 Q51001.3 Q51002.3 Q51006.3 Q51007.3 Q51008.3 Q51012.3 Q51013.3 Q51014.3 Q51015.3 R51000.1 R51001.2 | length 269.7
  Solder Side w0.2: J51007.A11 37.3,69.5 38.5,70.7 41.3,70.7 42.3,69.7 47.389,69.7 47.989,70.3 50.444,70.3 J51008.A11 67.3,69.5 68.5,70.7 71.3,70.7 72.3,69.7 77.389,69.7 77.989,70.3 80.444,70.3 J51028.A11 87.9,69.5 92,65.4 92,47.9 96,43.9 102.4,43.9 106.7,39.6 110.355,39.6 J51005.B1 135.8,40.5 136.7,39.6 140.355,39.6 J51004.B1 165.8,40.5 166.7,39.6 170.355,39.6 J51003.B1 195.8,40.5 196.7,39.6 200.355,39.6 J51002.B1 225.8,40.5 226.7,39.6 230.355,39.6 J51001.B1 255.8,40.5 256.7,39.6 260.355,39.6 J51000.B1
LIMIT: J51000.B3 J51001.B3 J51002.B3 J51003.B3 J51004.B3 J51005.B3 J51007.A9 J51008.A9 J51028.A9 R51010.1 R51011.2 | length 267.6
  Solder Side w0.2: J51007.A9 45.789,71.5 45.989,71.7 47.389,71.7 47.989,72.3 50.444,72.3 J51008.A9 75.789,71.5 75.989,71.7 77.389,71.7 77.989,72.3 80.444,72.3 J51028.A9 87.2,71.5 92.8,65.9 92.8,48.3 96.4,44.7 103.6,44.7 106,42.3 107.4,42.3 108,41.7 110.455,41.7 J51005.B3 135.8,42.5 136,42.3 137.4,42.3 138,41.7 140.455,41.7 J51004.B3 165.8,42.5 166,42.3 167.4,42.3 168,41.7 170.455,41.7 J51003.B3 195.8,42.5 196,42.3 197.4,42.3 198,41.7 200.455,41.7 J51002.B3 225.8,42.5 226,42.3 227.4,42.3 228,41.7 230.455,41.7 J51001.B3 255.8,42.5 256,42.3 257.4,42.3 258,41.7 260.455,41.7 J51000.B3
NetD51000_1: D51000.1 R51007.1 | length 3.4
  Component Side w0.2: R51007.1 D51000.1
NetD51001_1: D51001.1 R51044.1 | length 3.4
  Component Side w0.2: D51001.1 R51044.1
NetD51002_1: D51002.1 R51045.1 | length 3.4
  Component Side w0.2: D51002.1 R51045.1
NetD51003_1: D51003.1 R51046.1 | length 3.4
  Component Side w0.2: D51003.1 R51046.1
NetD51004_1: D51004.1 R51008.1 | length 3.4
  Component Side w0.2: R51008.1 D51004.1
NetD51005_1: D51005.1 R51009.1 | length 3.4
  Component Side w0.2: R51009.1 D51005.1
NetD51006_1: D51006.1 R51018.1 | length 3.4
  Component Side w0.2: R51018.1 D51006.1
NetD51007_1: D51007.1 R51019.1 | length 3.4
  Component Side w0.2: R51019.1 D51007.1
NetD51008_1: D51008.1 R51020.1 | length 3.4
  Component Side w0.2: R51020.1 D51008.1
NetJ51000_A1: J51000.A1 Q51000.1 Q51003.1 R51002.1 | length 20.8
  Component Side w0.2: J51000.A1 259.755,41.5 261.7,41.5 262.8,40.4 269.6,40.4 R51002.1 269.05,41.75 Q51000.1 Q51003.1@269.05,48.95
NetJ51000_A11: J51000.A11 J51012.1 | length 9.5
  Component Side w0.2: J51012.1 251.77,50.5 J51000.A11
NetJ51000_A12: J51000.A12 J51012.2 | length 7.7
  Component Side w0.2: J51012.2 254.525,51.27 J51000.A12
NetJ51000_A13: J51000.A13 J51013.1 | length 10.5
  Component Side w0.2: J51013.1 251.67,58.73 255.9,54.5 J51000.A13
NetJ51000_A14: J51000.A14 J51013.2 | length 9.1
  Component Side w0.2: J51013.2 255.769,55.5 J51000.A14
NetJ51001_A1: J51001.A1 Q51001.1 Q51004.1 R51003.1 | length 20.8
  Component Side w0.2: J51001.A1 229.755,41.5 231.7,41.5 232.8,40.4 239.6,40.4 R51003.1 239.05,41.75 Q51001.1 Q51004.1@239.05,48.95
NetJ51001_A11: J51001.A11 J51016.1 | length 9.5
  Component Side w0.2: J51016.1 221.77,50.5 J51001.A11
NetJ51001_A12: J51001.A12 J51016.2 | length 7.7
  Component Side w0.2: J51016.2 224.525,51.27 J51001.A12
NetJ51001_A13: J51001.A13 J51017.1 | length 10.5
  Component Side w0.2: J51017.1 221.67,58.73 225.9,54.5 J51001.A13
NetJ51001_A14: J51001.A14 J51017.2 | length 9.1
  Component Side w0.2: J51017.2 225.77,55.5 J51001.A14
NetJ51002_A1: J51002.A1 Q51002.1 Q51005.1 R51004.1 | length 20.8
  Component Side w0.2: J51002.A1 199.755,41.5 201.7,41.5 202.8,40.4 209.6,40.4 R51004.1 209.05,41.75 Q51002.1 Q51005.1@209.05,48.95
NetJ51002_A11: J51002.A11 J51014.1 | length 9.5
  Component Side w0.2: J51014.1 191.771,50.5 J51002.A11
NetJ51002_A12: J51002.A12 J51014.2 | length 7.7
  Component Side w0.2: J51014.2 194.525,51.27 J51002.A12
NetJ51002_A13: J51002.A13 J51015.1 | length 10.5
  Component Side w0.2: J51015.1 191.67,58.73 195.9,54.5 J51002.A13
NetJ51002_A14: J51002.A14 J51015.2 | length 9.1
  Component Side w0.2: J51015.2 195.77,55.5 J51002.A14
NetJ51003_A1: J51003.A1 Q51006.1 Q51009.1 R51012.1 | length 20.8
  Component Side w0.2: J51003.A1 169.755,41.5 171.7,41.5 172.8,40.4 179.6,40.4 R51012.1 179.05,41.75 Q51006.1 Q51009.1@179.05,48.95
NetJ51003_A11: J51003.A11 J51023.1 | length 9.5
  Component Side w0.2: J51023.1 161.77,50.501 J51003.A11
NetJ51003_A12: J51003.A12 J51023.2 | length 7.7
  Component Side w0.2: J51023.2 164.525,51.27 J51003.A12
NetJ51003_A13: J51003.A13 J51024.1 | length 10.5
  Component Side w0.2: J51024.1 161.67,58.73 165.9,54.501 J51003.A13
NetJ51003_A14: J51003.A14 J51024.2 | length 9.1
  Component Side w0.2: J51024.2 165.769,55.501 J51003.A14
NetJ51004_A1: J51004.A1 Q51007.1 Q51010.1 R51013.1 | length 20.8
  Component Side w0.2: J51004.A1 139.755,41.5 141.7,41.5 142.8,40.4 149.6,40.4 R51013.1 149.05,41.75 Q51007.1 Q51010.1@149.05,48.95
NetJ51004_A11: J51004.A11 J51021.1 | length 9.5
  Component Side w0.2: J51021.1 131.77,50.5 J51004.A11
NetJ51004_A12: J51004.A12 J51021.2 | length 7.7
  Component Side w0.2: J51021.2 134.525,51.27 J51004.A12
NetJ51004_A13: J51004.A13 J51022.1 | length 10.5
  Component Side w0.2: J51022.1 131.67,58.73 135.9,54.5 J51004.A13
NetJ51004_A14: J51004.A14 J51022.2 | length 9.1
  Component Side w0.2: J51022.2 135.769,55.5 J51004.A14
NetJ51005_A1: J51005.A1 Q51008.1 Q51011.1 R51014.1 | length 8.5
  Component Side w0.2: Q51011.1@119.05,48.95 Q51008.1 119.05,41.75 R51014.1
NetJ51005_A11: J51005.A11 J51025.1 | length 9.5
  Component Side w0.2: J51025.1 101.77,50.5 J51005.A11
NetJ51005_A12: J51005.A12 J51025.2 | length 7.7
  Component Side w0.2: J51025.2 104.525,51.27 J51005.A12
NetJ51005_A13: J51005.A13 J51026.1 | length 10.5
  Component Side w0.2: J51026.1 101.67,58.73 105.9,54.5 J51005.A13
NetJ51005_A14: J51005.A14 J51026.2 | length 9.1
  Component Side w0.2: J51026.2 105.769,55.5 J51005.A14
NetJ51006_1: J51006.1 U51000.1
NetJ51006_2: J51006.2 U51000.2
NetJ51007_B1: J51007.B1 Q51013.1 Q51016.1 R51041.1 | length 8.5
  Component Side w0.2: R51041.1 30.95,78.25 Q51013.1 Q51016.1@30.95,71.05
NetJ51008_B1: J51008.B1 Q51014.1 Q51017.1 R51042.1 | length 8.5
  Component Side w0.2: R51042.1 60.95,78.25 Q51014.1 Q51017.1@60.95,71.05
NetJ51028_B1: J51028.B1 Q51015.1 Q51018.1 R51043.1 | length 8.5
  Component Side w0.2: R51043.1 90.95,78.25 Q51015.1 Q51018.1@90.95,71.05
NetQ51012_1: Q51012.1 R51040.1 U51000.8
NetQ51016_2: Q51016.2 R51044.2 | length 5.6
  Component Side w0.2: Q51016.2@29.05,71.05 29.05,66.75 R51044.2
NetQ51017_2: Q51017.2 R51045.2 | length 5.6
  Component Side w0.2: Q51017.2@59.05,71.05 59.05,66.75 R51045.2
NetQ51018_2: Q51018.2 R51046.2 | length 5.6
  Component Side w0.2: Q51018.2@89.05,71.05 89.05,66.75 R51046.2
TRIGGER: J51000.B2 J51001.B2 J51002.B2 J51003.B2 J51004.B2 J51005.B2 J51007.A10 J51008.A10 J51028.A10 R51005.1 R51006.2 | length 267.5
  Solder Side w0.2: J51007.A10 37,70.5 37.6,71.1 46.235,71.1 46.435,71.3 47.389,71.3 47.989,70.7 50.689,70.7 50.89,70.5 J51008.A10 67,70.5 67.6,71.1 76.235,71.1 76.435,71.3 77.389,71.3 77.989,70.7 80.689,70.7 80.89,70.5 J51028.A10 87.5,70.5 92.4,65.6 92.4,48.1 96.2,44.3 102.6,44.3 106.185,40.715 107.415,40.715 108,41.3 110.7,41.3 110.9,41.5 J51005.B2 135.4,41.5 136.185,40.715 137.415,40.715 138,41.3 140.7,41.3 140.9,41.5 J51004.B2 165.4,41.5 166.185,40.715 167.415,40.715 168,41.3 170.7,41.3 170.9,41.5 J51003.B2 195.4,41.5 196.185,40.715 197.415,40.715 198,41.3 200.7,41.3 200.9,41.5 J51002.B2 225.4,41.5 226.185,40.715 227.415,40.715 228,41.3 230.7,41.3 230.9,41.5 J51001.B2 255.4,41.5 256.185,40.715 257.415,40.715 258,41.3 260.7,41.3 260.9,41.5 J51000.B2
VCC_EXTRA: J51000.A16 J51000.B16 J51001.A16 J51001.B16 J51002.A16 J51002.B16 J51003.A16 J51003.B16 J51004.A16 J51004.B16 J51005.A16 J51005.B16 J51007.A16 J51007.B2 J51007.B3 J51007.B4 J51007.B5 J51007.B6 J51007.B7 J51007.B8 J51007.B9 J51008.A16 J51028.A16 J51032.1 J51033.1 J51038.1 J51039.1 J51044.1 J51045.1 | length 152.1
  Solder Side w0.6: J51005.B16 127.5,57.5 128,57 131.9,57 132.4,57.5 J51004.A16 J51004.B16 157.5,57.5 158,57 161.9,57 162.4,57.5 J51003.A16 J51003.B16 187.5,57.5 188,57 191.9,57 192.4,57.5 J51002.A16 J51002.B16 217.5,57.5 218,57 221.9,57 222.4,57.5 J51001.A16 J51001.B16 247.5,57.5 248,57 251.9,57 252.4,57.5 J51000.A16 J51000.B16
VCC_P5V0: J51000.A17 J51000.B17 J51001.A17 J51001.B17 J51002.A17 J51002.B17 J51003.A17 J51003.B17 J51004.A17 J51004.B17 J51005.A17 J51005.B17 J51007.A17 J51008.A17 J51008.B2 J51008.B3 J51008.B4 J51008.B5 J51008.B6 J51008.B7 J51008.B8 J51008.B9 J51009.8 J51009.10 J51010.8 J51010.10 J51011.8 J51011.10 J51018.8 J51018.10 J51019.8 J51019.10 J51020.8 J51020.10 J51027.31 J51027.33 J51028.A17 J51034.1 J51035.1 J51040.1 J51041.1 J51046.1 J51047.1 Q51003.2 Q51004.2 Q51005.2 Q51009.2 Q51010.2 Q51011.2 Q51016.3 Q51017.3 Q51018.3 R51000.2 R51002.2 R51003.2 R51004.2 R51005.2 R51010.2 R51012.2 R51013.2 R51014.2 R51015.2 R51017.2 R51022.2 R51023.2 R51024.2 R51025.2 R51026.2 R51027.2 R51028.2 R51029.2 R51030.2 R51040.2 R51041.2 R51042.2 R51043.2
VCC_P18V: J51000.A18 J51000.B18 J51001.A18 J51001.B18 J51002.A18 J51002.B18 J51003.A18 J51003.B18 J51004.A18 J51004.B18 J51005.A18 J51005.B18 J51007.A18 J51008.A18 J51028.A18 J51028.B2 J51028.B3 J51028.B4 J51028.B5 J51028.B6 J51028.B7 J51028.B8 J51028.B9 J51036.1 J51037.1 J51042.1 J51043.1 J51048.1 J51049.1 | length 164.5
  Solder Side w0.6: J51005.B18 125.1,59.5 128.6,63 131.5,63 135,59.5 J51004.A18 J51004.B18 155.1,59.5 158.6,63 161.5,63 165,59.5 J51003.A18 J51003.B18 185.1,59.5 188.6,63 191.5,63 195,59.5 J51002.A18 J51002.B18 215.1,59.5 218.6,63 221.5,63 225,59.5 J51001.A18 J51001.B18 245.1,59.5 248.6,63 251.5,63 255,59.5 J51000.A18 J51000.B18
pads on no net: J51000.MH1 J51000.MH2 J51001.MH1 J51001.MH2 J51002.MH1 J51002.MH2 J51003.MH1 J51003.MH2 J51004.MH1 J51004.MH2 J51005.MH1 J51005.MH2 J51007.B10 J51007.B13 J51007.MH1 J51007.MH2 J51008.B10 J51008.B13 J51008.MH1 J51008.MH2 J51028.B10 J51028.B13 J51028.MH1 J51028.MH2 M51000.0 M51001.0 M51002.0 M51003.0 M51004.0 M51005.0 M51006.0 M51007.0 M51008.0 M51009.0 M51010.0 M51011.0 M51012.0 M51013.0 M51014.0 M51015.0 M51016.0 M51017.0 U51000.3 U51000.4 U51000.5 U51000.6

## Polygon pours and split planes (outlines as drawn)
VCC_P5V0 on Power Plane (split plane): 299.49,0.51 0.51,0.51 0.51,99.49 299.49,99.49
GND on Ground Plane (split plane): 299.49,0.51 0.51,0.51 0.51,99.49 299.49,99.49